# Altium PCB PCB2.PcbDoc
Units mm, origin at the board's own origin, x right, y up, seen from the top; angles counter-clockwise.
Board outline 27 x 27 mm, 2 copper layers (Top Layer, Bottom Layer); 13 components, 20 nets, 56 pads, 3 vias.
Unrouted connection lines stored in the file: 1.
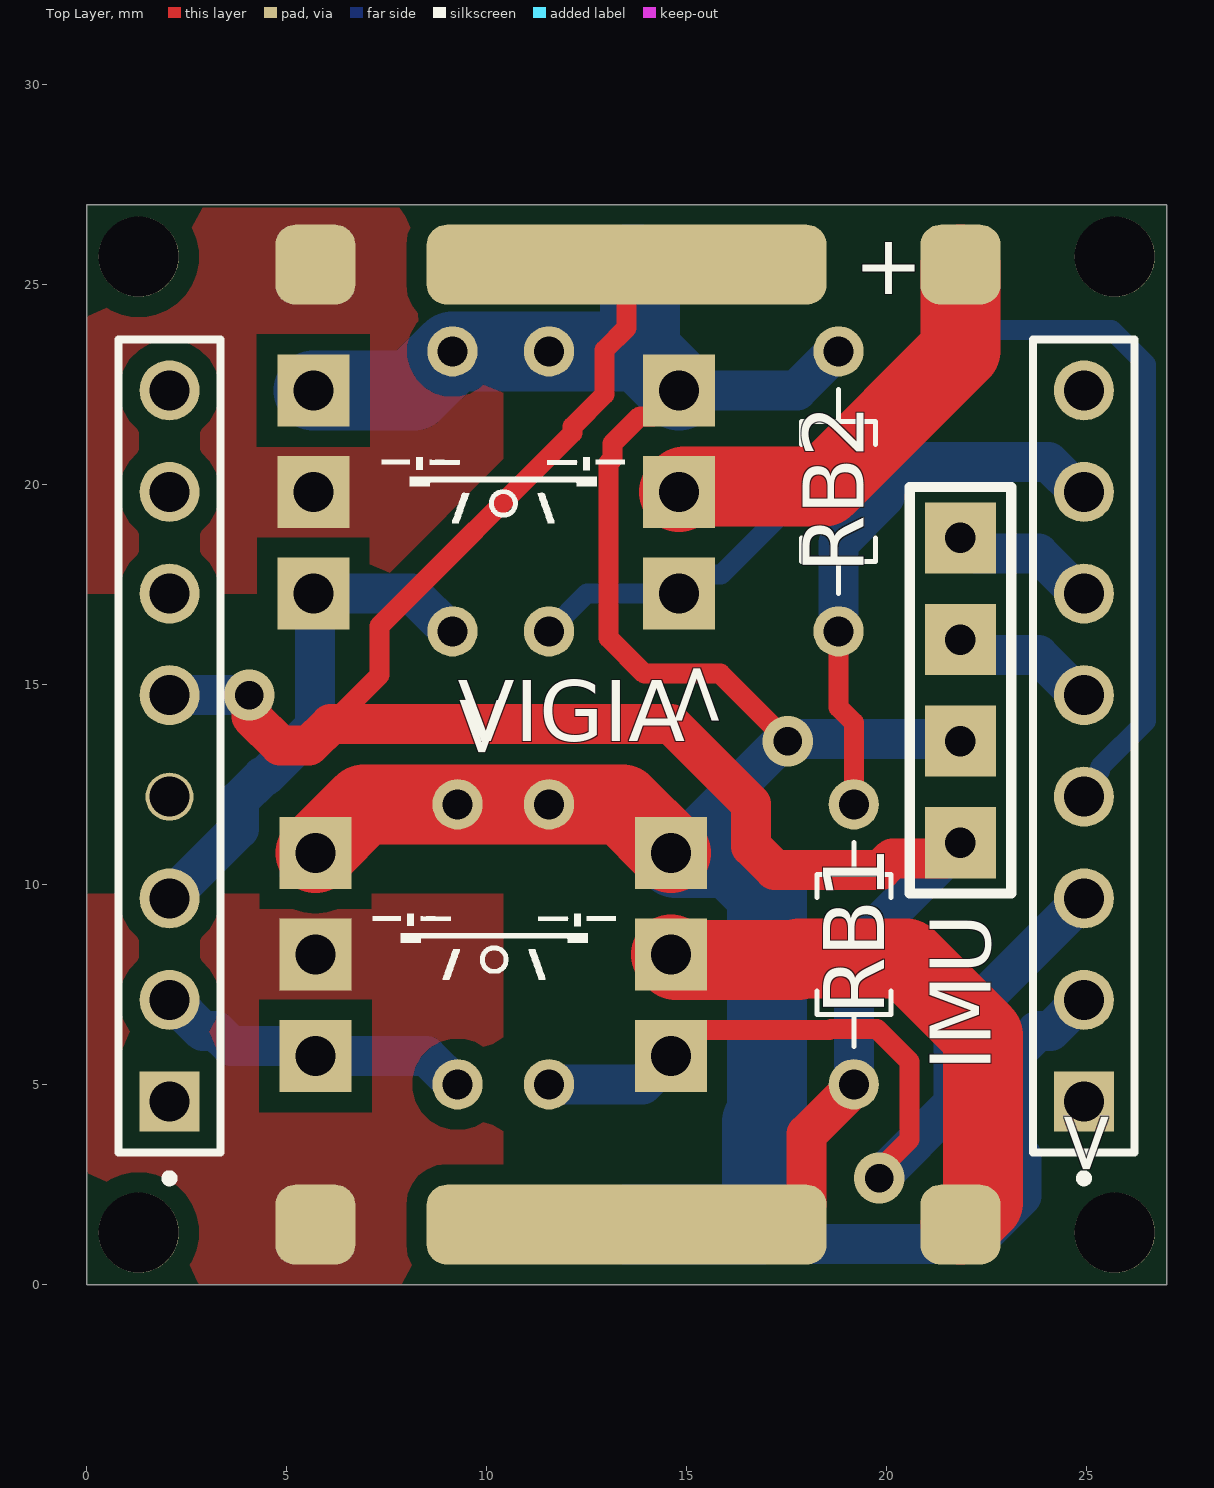
[diagram p0: Top Layer view]
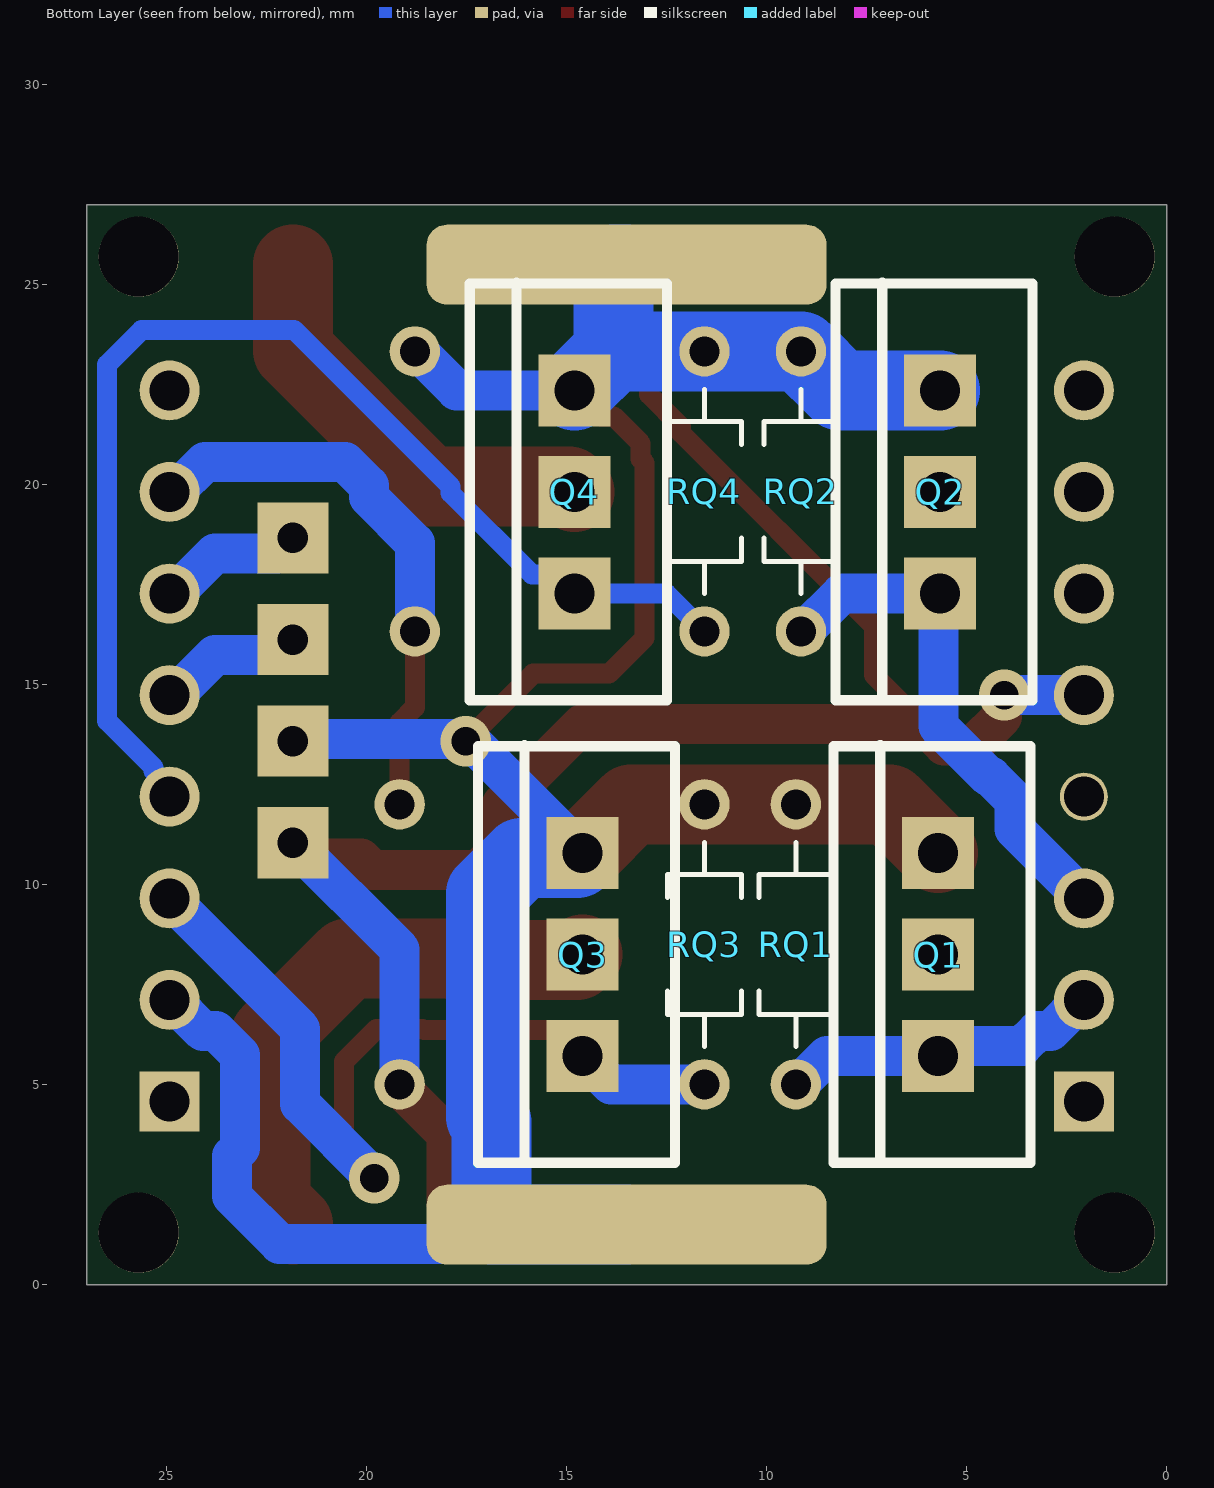
[diagram p1: Bottom Layer view, seen from below]

## Layer stack, top to bottom
Top Solder: solder mask 0.0102, Solder Resist, Dk 3.5
Top Layer: signal copper 0.0356
Dielectric 1: dielectric 0.32, FR-4, Dk 4.8
Bottom Layer: signal copper 0.0356
Bottom Solder: solder mask 0.0102, Solder Resist, Dk 3.5

## Board outline
0,0 0,27 27,27 27,0

## Design rules (kind name [scope] priority, off if disabled: settings)
Clearance [All] p1: gap=0.508 ignorepadtopadclearanceinfootprint=FALSE
PolygonConnect [All] p1: connectstyle=Direct reliefconductorwidth=0.254 reliefentries=4 polygonreliefangle="90 Angle" airgapwidth=0.254
RoutingVias [All] p1: holewidth=0.711 width=1.27 viastyle="Through Hole" minholewidth=0.711 minwidth=1.27 maxholewidth=0.711 maxwidth=1.27
SolderMaskExpansion [All] p1: expansion=0.102 istentingtop=FALSE
SupplyNets "Schematic Supply Nets" [InNet('GND')] p1: voltage=0.000
Width [All] p1: maxlimit=2 minlimit=0.5 preferedwidth=1 minimp=50.000000 maximp=50.000000 favimp=50.000000
30 further rules are at their usual default settings.

## Components (designator, comment, footprint, x,y, rotation, side; value= is the part's Value field where it differs from the comment)
IMU "CONECTOR_4PIN" CON4 21.844,11.049 r90 top
Q1 "MOSFET-N" TO220 5.715,5.715 r90 bottom
Q2 "MOSFET-N" TO220 5.664,17.28 r90 bottom
Q3 "MOSFET-N" TO220 14.605,5.715 r90 bottom
Q4 "MOSFET-N" TO220 14.808,17.28 r90 bottom
RB1 "920k" RESAD700W45L350D185 19.177,8.509 r90 top
RB2 "3.3M" RESAD700W45L350D185 18.796,19.833 r90 top
RQ1 "10K" RESAD700W45L350D185 9.271,8.509 r270 bottom
RQ2 "10K" RESAD700W45L350D185 9.144,19.833 r270 bottom
RQ3 "10K" RESAD700W45L350D185 11.557,8.509 r270 bottom
RQ4 "10K" RESAD700W45L350D185 11.557,19.833 r270 bottom
VIGIA "SS-108-T-2" SAMTEC_SS-108-T-2#1 24.93,4.58 r270 top (schematic designator ESP32-CAM)
? "SS-108-T-2" SAMTEC_SS-108-T-2#2 2.07,4.58 r270 top

## Footprints (in the part's own frame and the unit in brackets; to place one, negate y for a bottom-side part, rotate by r counter-clockwise, add the part's x,y. Pads: shape width x height; smd on the part's side, far side on the other; paste and mask are expansions set on the pad)
CON4 [mil]
  rect 70x70 hole 30: 1(0,0) 2(100,0) 3(200,0) 4(300,0)
  silkscreen extent -50,-50 350,50, body extent -50,-47 343,45, height 519
RESAD700W45L350D185 [mm]
  round 1.258 hole 0.75: 1(-3.5,0) 2(3.5,0)
  silkscreen extent -2.55,-0.92 2.55,0.92, body extent -3.72,-0.92 3.72,0.92, height 1.84
SAMTEC_SS-108-T-2#1 [mm]
  rect 1.5x1.5 hole 1: 01(0,0)
  round 1.5 hole 1: 02(-2.54,0) 03(-5.08,0) 04(-7.62,0) 05(-10.16,0) 06(-12.7,0) 07(-15.24,0) 08(-17.78,0)
  silkscreen extent -19.05,-1.27 2.02,1.27
SAMTEC_SS-108-T-2#2 [mm]
  rect 1.5x1.5 hole 1: 01(0,0)
  round 1.5 hole 1: 02(-2.54,0) 03(-5.08,0) 05(-10.16,0) 06(-12.7,0) 07(-15.24,0) 08(-17.78,0)
  round 1.2 hole 1: 04(-7.62,0)
  silkscreen extent -19.05,-1.27 2.02,1.27
TO220 [mm]
  rect 1.8x1.8 hole 1: 1(0,0) 2(2.54,0) 3(5.08,0)
  silkscreen extent -2.67,-2.31 7.77,2.62, body extent -2.41,-2.12 7.49,2.38, height 20.66

## Part data
Q1 Q2 Q3 Q4: "N-Channel MOSFET"
RB1 RB2 RQ1 RQ2 RQ3 RQ4: library part 3-1623927-1, "1 MOhms Â±5% 0.25W, 1/4W Through Hole Resistor Axial - Carbon Film", Package=None, Check_prices=https://www.snapeda.com/parts/3-1623927-1/TE+Connectivity/view-part/?ref=eda, MF="TE Connectivity", MP=3-1623927-1, SnapEDA_Link=https://www.snapeda.com/parts/3-1623927-1/TE+Connectivity/view-part/?ref=snap
VIGIA ?: "SS Series .100 Single Row Screw Machine Socket Strip", Package=None, Availability=Bad, Check_prices=https://www.snapeda.com/parts/SS-108-T-2/Samtec/view-part/3323909/?ref=eda, MF=Samtec, MP=SS-108-T-2, Price=None, SnapEDA_Link=https://www.snapeda.com/parts/SS-108-T-2/Samtec/view-part/3323909/?ref=snap

## Free pads (board coordinates)
  round 2 hole 2: 1(1.3,25.7) 2(25.7,25.7) 7(25.7,1.3) 8(1.3,1.3)
  rrect50% 2x2 smd: 25(5.715,1.5) 25(5.715,25.5) 25(21.844,1.5) 25(21.844,25.5)
  rrect50% 10x2 smd: 25(13.5,1.5) 25(13.5,25.5)
  rrect50% 10x2 smd far side: 25(13.5,1.5) 25(13.5,25.5)

## Via types
v1: diameter 1.27, hole 0.711, Top Layer to Bottom Layer, 3 vias

## Nets (pads, with @x,y where several pads share a name; then routed paths per layer and width w, separated by ;. In a path a pad name is that pad's centre, name@x,y a point inside that pad or via, vN(x,y) a via of type N, cw(c..) or ccw(c..) an arc to the next point about the centre after c; other vN are vias at no path point)
3.3V: ?.01
5V: VIGIA.01
GND: IMU.2 pad.25@13.5,1.5 pad.25@13.5,25.5 Q1.3 Q2.3 Q3.3 Q4.3 RB2.2 RQ1.1 RQ2.1 RQ3.1 RQ4.1 VIGIA.02 | length 80.2
  Top Layer w0.5: Q4.3 14.158,21.71 13.826,21.71 13.15,21.034 13.15,20.648 13.05,20.548 13.05,16.166 13.941,15.275 15.84,15.275 v1(17.526,13.589)
  Top Layer w2: Q1.3 6.929,12.009 RQ1.1 RQ3.1 13.391,12.009 Q3.3
  Bottom Layer w0.5: Q1.3@5.065,10.23 5.065,10.876 5.634,11.445 Q1.3@5.676,11.445
  Bottom Layer w1: pad.25@13.5,1.5 17.013,1.5 17.489,1.024 22.179,1.024 23.368,2.213 23.368,3.216 23.172,3.412 23.172,5.748 23.762,6.338 24.094,6.338 24.876,7.12 VIGIA.02 ; Q3.3 17.456,13.646 21.787,13.646 IMU.2 ; Q4.3 17.753,22.36 18.726,23.333 RB2.2
  Bottom Layer w2: Q2.3 8.171,22.36 RQ2.1 RQ4.1 13.835,23.333 ; pad.25@13.5,1.5 16.886,1.5 16.886,4.064 17.013,4.19 17.013,9.78 16.13,10.663 Q3.3@14.737,10.663 ; pad.25@13.5,25.5 13.835,25.5 13.835,23.333 ; Q4.3 13.835,23.333
GPIO01(DBG2): ?.07
GPIO02(VBAT): RB1.2 RB2.1 VIGIA.07 | length 14.1
  Top Layer w0.5: RB2.1 18.796,14.434 19.177,14.053 RB1.2
  Bottom Layer w1: RB2.1 18.796,18.542 19.947,19.693 19.947,19.976 20.537,20.566 24.049,20.566 24.795,19.82 VIGIA.07
GPIO03(DBG1): ?.06
GPIO04: VIGIA.08
GPIO10(M2): ?.03 Q2.1 RQ2.2 | length 13
  Bottom Layer w1: ?.03 3.807,11.397 3.807,12.113 4.397,12.703 4.448,12.703 5.707,13.962 5.707,17.237 Q2.1 8.127,17.28 9.074,16.333 RQ2.2
GPIO12(M3): Q3.1 RQ3.2 VIGIA.03 | length 22.3
  Top Layer w0.5: Q3.1 15.255,6.365 18.571,6.365 18.602,6.396 19.752,6.396 20.564,5.584 20.564,3.627 19.812,2.875 v1(19.812,2.667)
  Bottom Layer w1: RQ3.2 13.899,5.009 Q3.1 ; v1(19.812,2.667) 21.664,4.519 21.664,6.394 VIGIA.03
GPIO13(M4): Q4.1 RQ4.2 VIGIA.04 | length 30
  Bottom Layer w0.5: RQ4.2 12.504,17.28 Q4.1 15.283,17.755 15.863,17.755 17.903,19.796 17.903,19.958 21.813,23.868 25.625,23.868 26.488,23.005 26.488,14.095 25.328,12.935 25.328,12.842 24.93,12.444 VIGIA.04
GPIO14(SDA): IMU.4 VIGIA.06 | length 3.7
  Bottom Layer w1: IMU.4 22.233,18.28 23.795,18.28 24.795,17.28 VIGIA.06
GPIO15(SCL): IMU.3 VIGIA.05 | length 3.7
  Bottom Layer w1: IMU.3 22.233,15.74 23.795,15.74 24.795,14.74 VIGIA.05
GPIO16(M1): ?.02 Q1.1 RQ1.2 | length 8.1
  Bottom Layer w1: ?.02 2.124,7.12 2.906,6.338 3.238,6.338 3.607,5.969 5.461,5.969 Q1.1 8.495,5.715 9.201,5.009 RQ1.2
NetDBG1_A: 
NetDBG2_A: 
NetM1_1: pad.25@5.715,1.5 Q1.2
NetM2_1: pad.25@5.715,25.5 Q2.2
NetM3_1: pad.25@21.844,1.5 Q3.2 | length 13.6
  Top Layer w2: Q3.2 14.737,8.123 17.786,8.123 17.817,8.154 20.48,8.154 22.405,6.229 22.405,2.061 pad.25@21.844,1.5
NetM4_1: pad.25@21.844,25.5 Q4.2 | length 10.6
  Top Layer w2: Q4.2 14.94,19.952 18.437,19.952 21.844,23.359 pad.25@21.844,25.5
VBAT: ?.05 IMU.1 pad.25@13.5,1.5 pad.25@13.5,25.5 RB1.1 | length 53.1
  Top Layer w0.5: 6.097,14.017 7.322,15.242 7.322,16.472 12.142,21.292 12.142,21.451 12.944,22.253 12.944,23.368 13.5,23.924 pad.25@13.5,25.5
  Top Layer w1: v1(4.064,14.74) 4.116,14.688 4.116,14.202 4.836,13.482 5.562,13.482 6.097,14.017 14.609,14.017 16.613,12.013 16.613,10.958 17.199,10.372 19.855,10.372 20.143,10.66 21.455,10.66 IMU.1 ; pad.25@13.5,1.5 17.5,1.5 18,2 18,3.762 19.177,4.939 RB1.1
  Bottom Layer w1: ?.05 v1(4.064,14.74) ; RB1.1 19.177,8.382 IMU.1
pads on no net: ?.04 ?.08

## Polygon pours and split planes (outlines as drawn)
NetM2_1 on Top Layer "NETM2_1_L01_P001" (solid, pour order 1): 0,17.272 10.414,17.272 10.414,26.924 0,26.924
NetM1_1 on Top Layer "NETM1_1_L01_P000" (solid, remove dead copper, pour order 0): 0,9.779 10.414,9.779 10.414,0 0,0

## Silkscreen, mask and mechanical layers (free items; w line width, h text height)
Top Overlay:
  drawing of 20 lines, arcs and shapes, not listed
  text "+" at 19.177,24.765 h1.52
  text "<" at 14.605,15.621 h1.52 r270
  text "<" at 10.541,13.081 h1.52 r90
  text "<" at 25.654,2.667 h1.52 r90